# EAGLE board Addon-mapleCUx_Raspi-3V3-UART-CC2530-V04-006 (EAGLE 9.3.0)
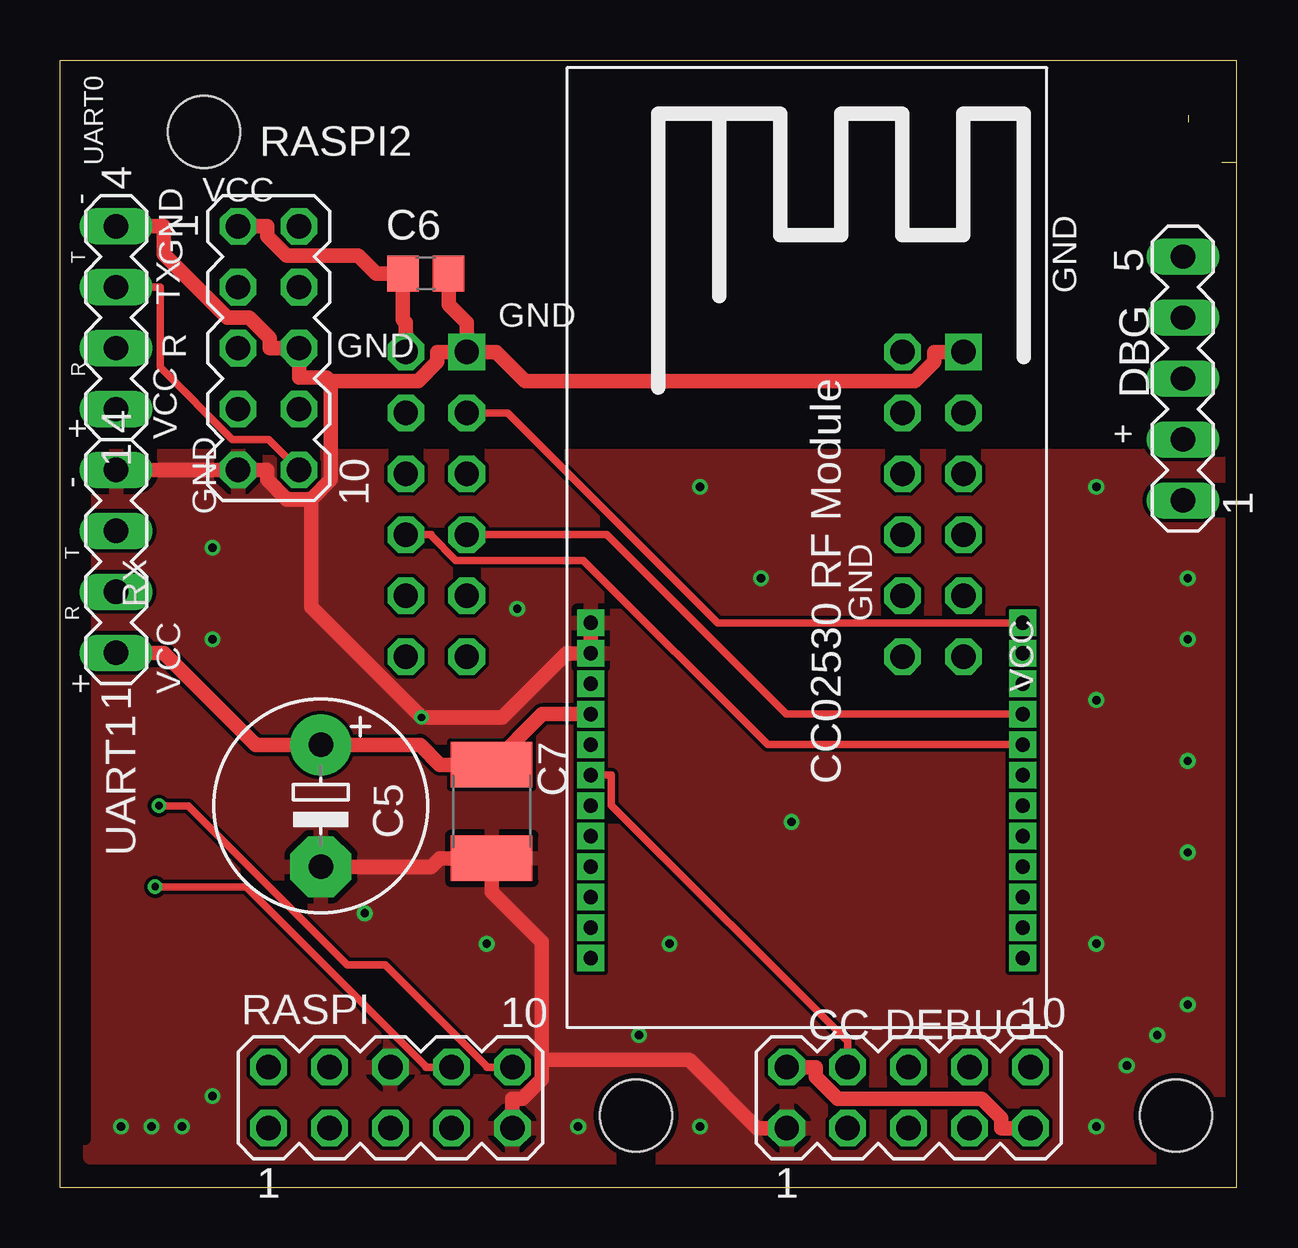
[diagram p0: board, top side]
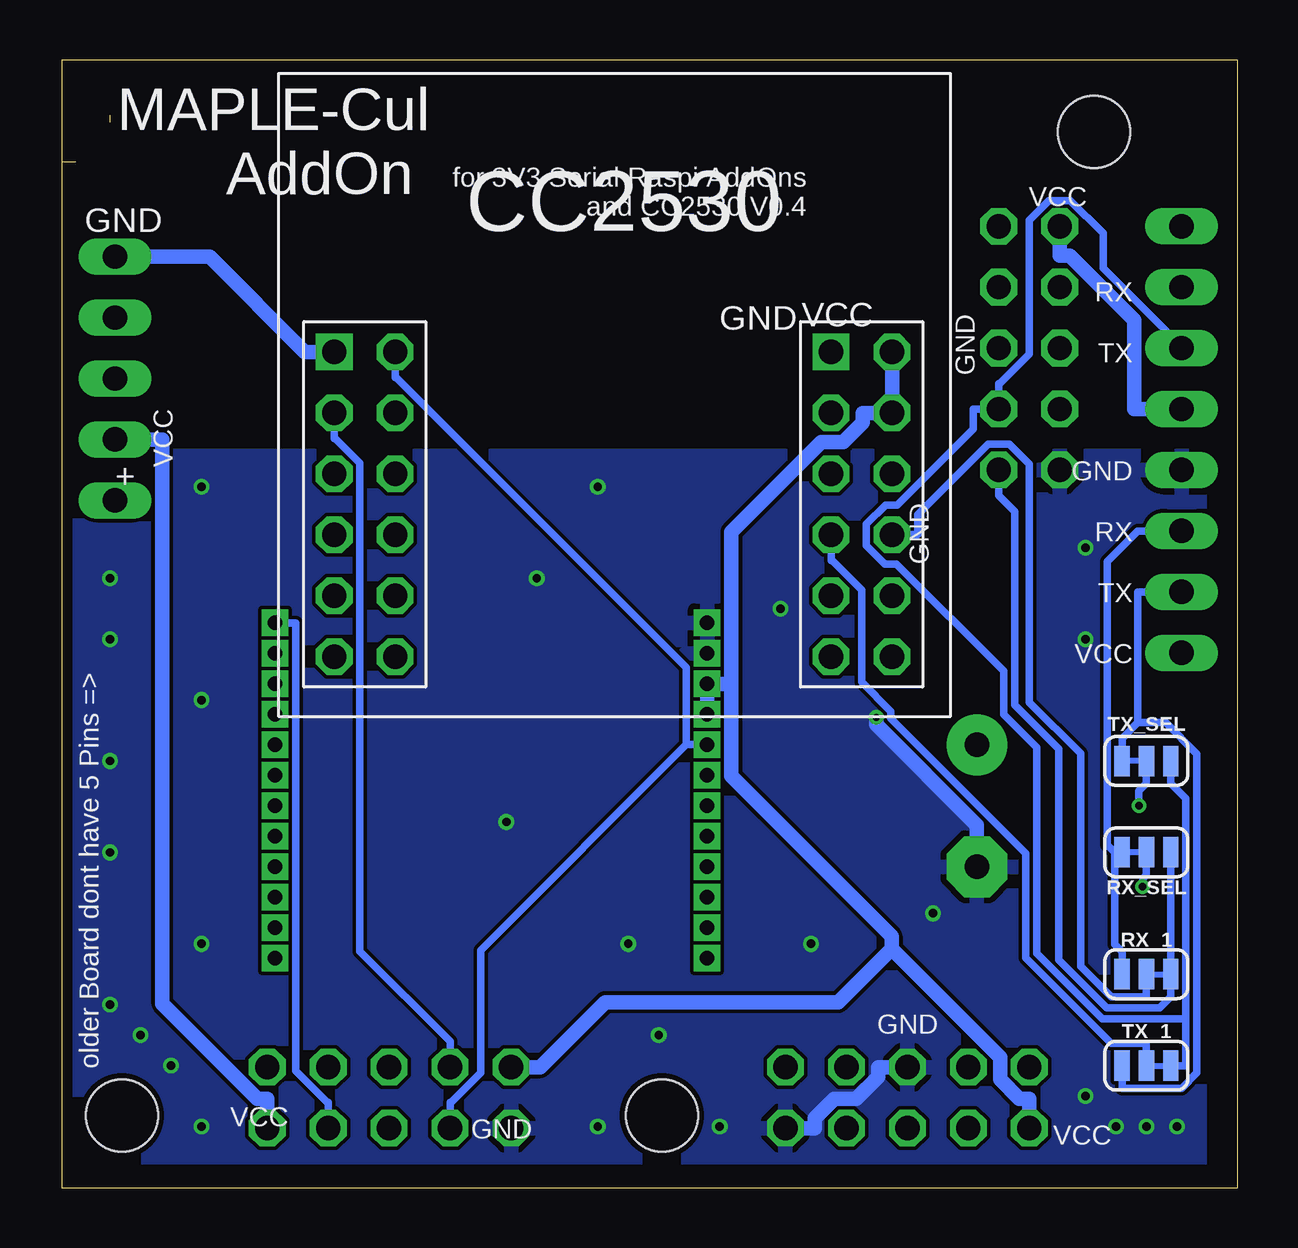
[diagram p1: board, bottom side, seen from below]

Size 49 x 47 mm. Coordinates in mm from the lower left corner, seen from the top.
Outline: 49,47 49,46.24
Outline: 47,44.7 47,44.41
Outline: 48.41,42.75 49,42.75
Outline: 49,47 0,47 0,0 49,0 49,42.75
Outline: 49,47 49,42.75
Copper layers (1*16): Top 0.035mm / dielectric 1.5mm / Bottom 0.035mm
Design rules "SeeedStudio_2layer_DRU_no_angle_20140221": minimum track width 6mil, minimum drill 12mil, track to track 6mil, track to pad 6mil, pad to pad 6mil, via to via 6mil, smd to smd 0mil, copper to edge 10mil, drill to drill 10mil, minimum pad ring 10mil, minimum via ring 6mil, stop-mask expansion 2mil, vias tented up to drill 100mil, thermal gap 10mil
Net classes: 0 default: width 0.305 mm; 1 PWR: width 0.61 mm
Holes 3 mm at 6,44 24,3 46.5,3
tRestrict: area 0.4,2 to 1.1,47.1
bRestrict: area 0.4,0.7 to 1.1,46.4

## Footprints (pad centres in the part's own frame; a part is rotated, then mirrored left to right if it is on the bottom)
E5-8,5 = drill 1.016 pad 2.54: + -2.54,0 | drill 1.016 pad 2.54 octagon: - 2.54,0
C0805 = smd 1.3 x 1.5: 1 -0.95,0; 2 0.95,0
C1812 = smd 1.9 x 3.4: 1 -1.95,0; 2 1.95,0
MA05-2 = drill 1.016 octagon: 1 -5.08,-1.27; 2 -5.08,1.27; 3 -2.54,-1.27; 4 -2.54,1.27; 5 0,-1.27; 6 0,1.27; 7 2.54,-1.27; 8 2.54,1.27; 9 5.08,-1.27; 10 5.08,1.27
MA05-1 = drill 1.016 long: 1 -5.08,0; 2 -2.54,0; 3 0,0; 4 2.54,0; 5 5.08,0
SMT-JUMPER_3_1-NC_TRACE_SILK = smd 0.635 x 1.27: 1 -1.016,0; 2 0,0; 3 1.016,0
CC2530PA = drill 0.6 pad 0.813 square: P$1 -9,-17.1; P$2 -9,-15.83; P$3 -9,-14.56; P$4 -9,-13.29; P$5 -9,-12.02; P$6 -9,-10.75; P$7 -9,-9.48; P$8 -9,-8.21; P$9 -9,-6.94; P$10 -9,-5.67; P$11 -9,-4.4; P$12 -9,-3.13; P$13 9,-17.1; P$14 9,-15.83; P$15 9,-14.56; P$16 9,-13.29; P$17 9,-12.02; P$18 9,-10.75; P$19 9,-9.48; P$20 9,-8.21; P$21 9,-6.94; P$22 9,-5.67; P$23 9,-4.4; P$24 9,-3.13
CC2530_DIL = drill 1.016 square: GND 2.316,15.19; GND2 23.017,15.19 | drill 1.016 octagon: P0_0 23.017,10.11; P0_1 25.557,10.11; P0_2\U_RX 23.017,7.57; P0_3\U_TX 25.557,7.57; P0_4 23.017,5.03; P0_5 25.557,5.03; P0_6 23.017,2.49; P0_7 25.557,2.49; P1_0 4.856,2.49; P1_1 2.316,2.49; P1_2 4.856,5.03; P1_3 2.316,5.03; P1_4 4.856,7.57; P1_5 2.316,7.57; P1_6 4.856,10.11; P1_7 2.316,10.11; P2_0 4.856,12.65; P2_1 2.316,12.65; P2_2 4.856,15.19; RST 23.017,12.65; VCC 25.557,15.19; VCC2 25.557,12.65
MA04-1 = drill 1.016 long: 1 -3.81,0; 2 -1.27,0; 3 1.27,0; 4 3.81,0

## Placement (x,y rotation side)
C5  220uF  [E5-8,5]  10.87,15.91 270 top
C6  22pF  [C0805]  15.24,38.1 0 top
C7  [C1812]  17.98,15.68 90 top
CC-DEBUG  [MA05-2]  35.36,3.75 0 top
DBG  [MA05-1]  46.79,33.72 90 top
RASPI  [MA05-2]  13.77,3.75 0 top
RASPI2  [MA05-2]  8.69,34.99 270 top
RX_1  JUMPER-SMT_3_1-NC_TRACE_SILK  [SMT-JUMPER_3_1-NC_TRACE_SILK]  3.81,8.89 0 bottom
RX_SEL  JUMPER-SMT_3_1-NC_TRACE_SILK  [SMT-JUMPER_3_1-NC_TRACE_SILK]  3.81,13.97 180 bottom
TX_1  JUMPER-SMT_3_1-NC_TRACE_SILK  [SMT-JUMPER_3_1-NC_TRACE_SILK]  3.81,5.08 0 bottom
TX_SEL  JUMPER-SMT_3_1-NC_TRACE_SILK  [SMT-JUMPER_3_1-NC_TRACE_SILK]  3.81,17.78 180 bottom
U$1  CC2530CC2530PA  [CC2530PA]  31.11,26.67 0 top
U$3  CC2530_MODULE  [CC2530_DIL]  39.97,19.64 0 bottom
UART0  [MA04-1]  2.34,36.26 90 top
UART1  [MA04-1]  2.34,26.1 90 top

## Library data of the parts
C5-C7 = rcl; SPICEPREFIX: C
CC-DEBUG DBG RASPI RASPI2 UART0 UART1 = con-lstb; OC_FARNELL: unknown; OC_NEWARK: unknown
RX_1 RX_SEL TX_1 TX_SEL = SparkFun-Jumpers
U$1 = zigbee
U$3 = Martin-Communication-V4

## Nets
BT: U$1.P$6
CCRX: TX_1.2 U$1.P$21 U$3.P0_2\U_RX
CCTX: RX_1.2 U$1.P$20 U$3.P0_3\U_TX
CS: CC-DEBUG.5
DC: CC-DEBUG.3 U$1.P$8 U$3.P2_2
DD: CC-DEBUG.4 U$1.P$7 U$3.P2_1
GND [PWR]: C5.- C6.2 C7.1 CC-DEBUG.1 DBG.5 RASPI2.6 RASPI2.9 RASPI.6 RASPI.9 U$1.P$11 U$1.P$12 U$3.GND U$3.GND2 UART0.4 UART1.4
IN2 [PWR]: DBG.1
MISO: CC-DEBUG.10
MOSI: CC-DEBUG.8
RST: CC-DEBUG.7 U$1.P$24 U$3.RST
RX: RASPI.10 TX_SEL.2
RX0: RASPI2.10 RX_1.3 RX_SEL.1 UART0.3
RX1: RX_1.1 RX_SEL.3 UART1.3
RX_DBG: DBG.4
SCLK: CC-DEBUG.6
TX: RASPI.8 RX_SEL.2
TX0: RASPI2.8 TX_1.3 TX_SEL.1 UART0.2
TX1: TX_1.1 TX_SEL.3 UART1.2
TX_DBG: DBG.3
VCC [PWR]: C5.+ C6.1 C7.2 CC-DEBUG.2 CC-DEBUG.9 DBG.2 RASPI2.1 RASPI.1 U$1.P$9 U$1.P$10 U$3.VCC U$3.VCC2 UART0.1 UART1.1

## Tracks (layer width: path | path; a pad name or v marks a point on that pad's centre or on a via)
CCRX
  Top 0.305: U$3.P0_2\U_RX 18.02,27.21 22.77,27.21 30.25,19.73 U$1.P$21
  Bottom 0.305: U$3.P0_2\U_RX 16.95,26.14 16.91,26.14 15.68,24.91 15.68,21.07 14.45,19.85 14.45,19.55 8.84,13.93 8.84,9.58 5.28,6.02 3.81,6.02 TX_1.2
CCTX
  Top 0.305: U$3.P0_3\U_TX 15.47,27.21 15.47,27.17 16.5,26.14 21.81,26.14 29.49,18.46 U$1.P$20
  Bottom 0.305: U$3.P0_3\U_TX 13.34,27.21 13.34,28.04 10.4,30.98 9.52,30.98 8.69,30.15 8.69,20.22 6.55,18.08 6.55,9.23 5.27,7.95 3.81,7.95 RX_1.2
DC
  Bottom 0.305: CC-DEBUG.3 32.82,3.54 32.78,3.54 31.55,4.77 31.55,9.88 22.97,18.46 | 22.97,18.46 22.86,18.46 U$1.P$8 | U$3.P2_2 35.11,33.76 35.07,33.76 22.97,21.67 22.97,18.46
DD
  Top 0.305: CC-DEBUG.4 32.82,6.08 22.97,15.93 22.97,17.19 U$1.P$7
  Bottom 0.305: CC-DEBUG.4 32.82,6.08 36.58,9.85 36.58,30.2 37.61,31.22 37.65,31.22 U$3.P2_1
GND  (via drill 0.3 pad 0.61, 0.35)
  Top 0.61: 20.07,5.31 20.07,4.51 19.26,3.7 18.85,3.7 RASPI.9 | 20.07,5.31 20.07,10.23 17.98,12.32 C7.1 16.91,13.72 15.83,13.72 15.47,13.37 12.6,13.37 C5.- | 20.07,5.31 26.23,5.31 29.06,2.48 CC-DEBUG.1 | UART0.4 4.32,40.07 4.32,38.9 6.96,36.26 7.88,36.26 8.74,35.4 8.74,34.99 RASPI2.6 9.96,33.77 11.12,33.77 11.28,33.61 | 11.28,33.61 14.92,33.61 15.73,34.42 15.73,34.83 U$3.GND2 | 10.46,28.69 11.28,29.51 11.28,33.61 | 10.46,28.69 9.45,28.69 8.64,29.5 8.64,29.91 RASPI2.9 UART1.4 | 10.46,28.69 10.46,24.2 v15.07,19.6 18.43,19.6 21.1,22.27 U$1.P$11 22.11,22.53 U$1.P$12 | U$3.GND 36.43,34.83 36.43,34.42 35.62,33.61 19.39,33.61 18.17,34.83 U$3.GND2 | U$3.GND2 16.95,36.05 16.19,36.81 C6.2
  Bottom 0.61: U$3.GND 38.87,34.83 42.84,38.8 DBG.5 | RASPI.6 14.99,5.02 14.99,4.61 15.9,3.7 16.82,3.7 17.63,2.89 17.63,2.48 RASPI.9 | C5.- 10.87,15.1 15.07,19.3 v15.07,19.6
  other vias: 6.35,26.67 6.35,22.86 2.54,2.54 3.81,2.54 5.08,2.54 6.35,3.81 12.7,11.43 17.78,10.16 25.4,10.16 30.48,15.24 26.67,29.21 29.21,25.4 43.18,29.21 43.18,20.32 43.18,10.16 43.18,2.54 44.45,5.08 45.72,6.35 46.99,7.62 46.99,13.97 46.99,17.78 46.99,22.86 46.99,25.4 26.67,2.54 21.59,2.54 24.13,6.35 19.05,24.13
  pour Bottom: 1.27,1.27 1.27,30.48 48.26,30.48 48.26,1.27
  pour Top: 48.26,30.48 48.26,1.27 1.27,1.27 1.27,30.48
RST
  Top 0.305: U$1.P$24 27.41,23.54 18.66,32.29 18.02,32.29 U$3.RST
  Bottom 0.305: CC-DEBUG.7 37.9,3.54 37.94,3.54 39.26,4.86 39.26,23.54 U$1.P$24
RX  (via drill 0.3 pad 0.61)
  Top 0.305: RASPI.10 17.78,5.02 17.78,5.06 13.55,9.29 11.96,9.29 5.34,15.91 v4.12,15.91
  Bottom 0.305: TX_SEL.2 3.81,16.84 4.12,16.53 v4.12,15.91
RX0
  Top 0.305: UART0.3 4.17,37.53 4.17,34.19 7.18,31.18 8.69,31.18 RASPI2.10
  Bottom 0.305: RASPI2.10 9.96,28.84 9.3,28.18 9.3,20.11 7.47,18.28 7.47,9.5 5.46,7.49 3.25,7.49 2.79,7.95 RX_1.3 RX_SEL.1
RX1
  Bottom 0.305: UART1.3 4.17,27.37 5.45,26.09 5.45,14.28 5.14,13.97 | RX_1.1 4.83,9.83 5.14,10.14 5.14,13.97 | RX_SEL.3 5.14,13.97
TX  (via drill 0.3 pad 0.61)
  Top 0.305: RASPI.8 15.24,5.02 15.24,5.06 7.76,12.54 v3.97,12.54
  Bottom 0.305: RX_SEL.2 3.81,13.03 3.97,12.88 v3.97,12.54
TX0
  Bottom 0.305: 2.17,7.04 5.65,7.04 8.38,9.77 8.38,18.35 9.76,19.73 9.76,21.54 14.22,26 14.71,26 15.47,26.77 15.47,27.65 14.68,28.45 14.2,28.45 11.03,31.62 11.03,32.45 RASPI2.8 9.96,33.52 9.92,33.52 8.69,34.74 8.69,40.32 7.87,41.14 6.98,41.14 5.61,39.77 5.61,38.31 2.34,35.04 UART0.2 | 2.17,7.04 2.17,16.22 2.79,16.84 TX_SEL.1 | 2.17,7.04 2.17,5.08 TX_1.3
TX1
  Bottom 0.305: 4.17,19.38 4.17,24.83 UART1.2 | 4.17,19.38 4.83,18.72 TX_SEL.3 | 4.17,19.38 3.01,19.38 1.71,18.08 1.71,4.77 2.35,4.14 4.83,4.14 TX_1.1
VCC
  Top 0.61: U$1.P$9 20.09,19.73 C7.2 15.83,17.62 15,18.45 C5.+ 8.16,18.45 4.32,22.29 UART1.1 | CC-DEBUG.2 31.5,5.02 31.5,4.61 32.41,3.7 38.41,3.7 39.22,2.89 39.22,2.48 CC-DEBUG.9 | RASPI2.1 8.64,40.07 8.64,39.66 9.45,38.85 12.43,38.85 13.18,38.1 C6.1 14.29,36.17 14.41,36.05 U$3.VCC
  Bottom 0.61: DBG.2 44.81,31.18 44.81,7.66 40.85,3.7 40.44,3.7 CC-DEBUG.9 | 14.43,9.94 16.65,7.72 26.36,7.72 29.06,5.02 CC-DEBUG.2 | 21.1,21 21.1,17.15 14.43,10.47 14.43,9.94 | 14.43,9.94 | 14.43,9.94 9.91,5.42 9.91,4.51 9.1,3.7 8.69,3.7 RASPI.1 | UART0.1 4.32,32.45 4.32,36.16 7.01,38.85 7.42,38.85 RASPI2.1 | 21.1,21 U$1.P$10 U$1.P$9 | 21.1,21 21.1,27.32 17.36,31.07 16.44,31.07 15.63,31.88 15.63,32.29 U$3.VCC2 U$3.VCC

## Text on the board
tNames: GND | VCC | - | T | TX | GND | R | GND | GND | R | + | VCC | + | - | GND | T | R | RX | VCC | GND | VCC | +
bNames: MAPLE-Cul / AddOn | for 3V3 Serial Raspi AddOns / and CC2530 V0.4 | VCC | GND | RX | VCC | GND | TX | GND | GND | VCC | + | RX | GND | TX | VCC | GND | older Board dont have 5 Pins => | VCC | GND | VCC